# EAGLE board PIC32_JTAG (EAGLE 7.6.0)
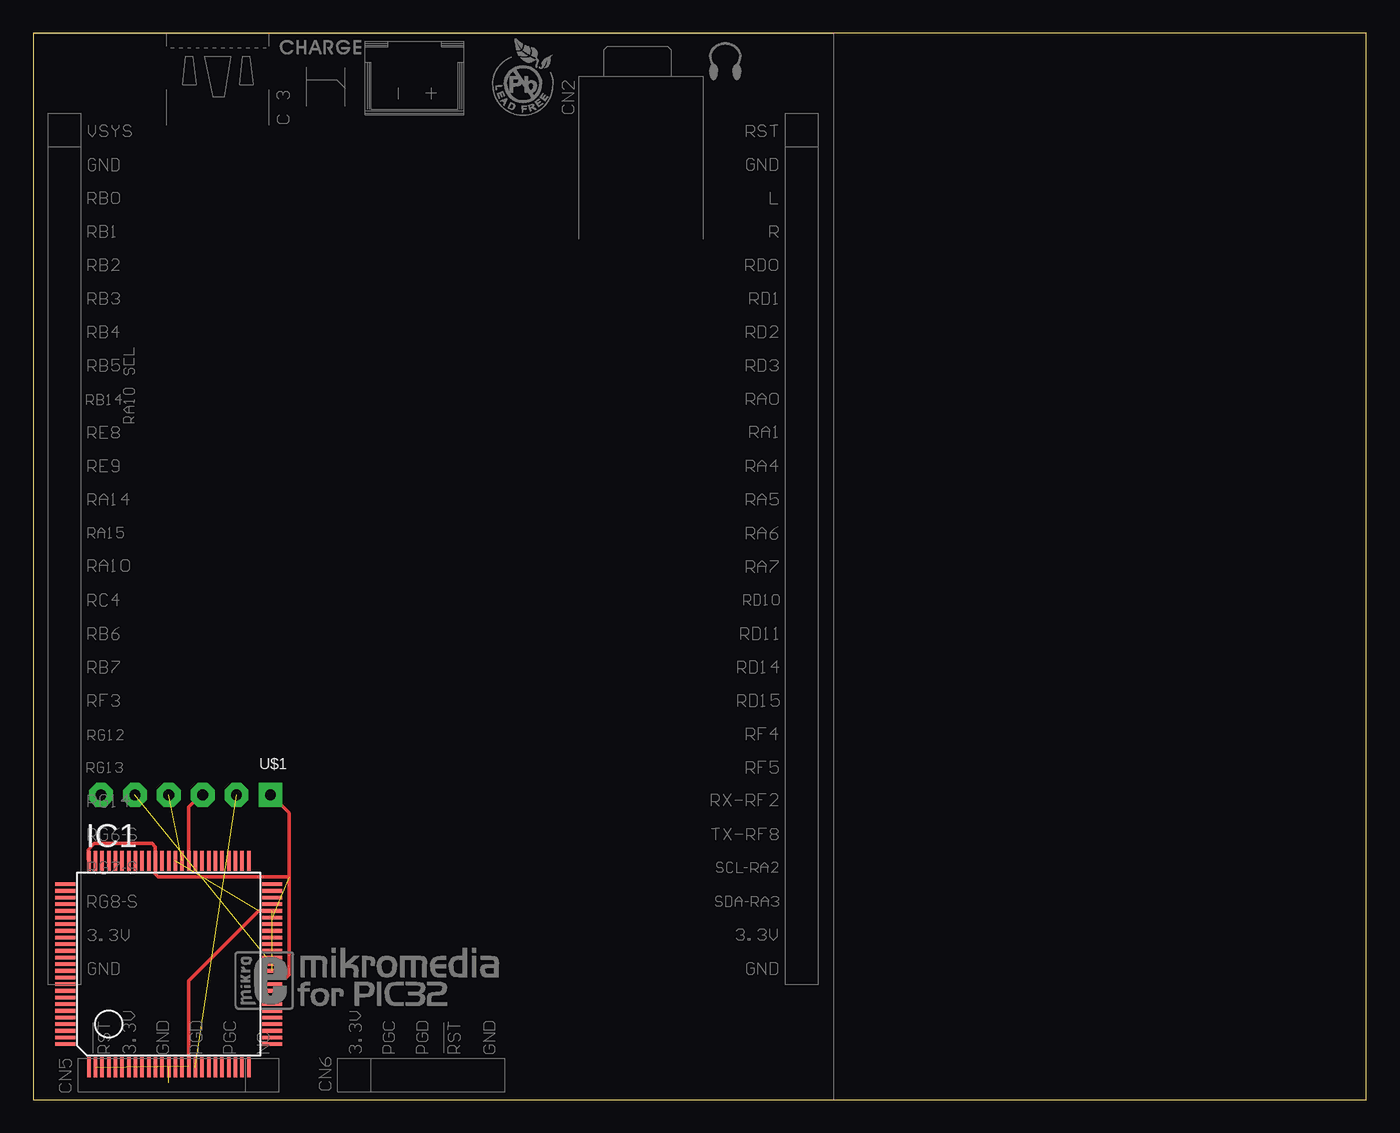
[diagram p0: board, top side]
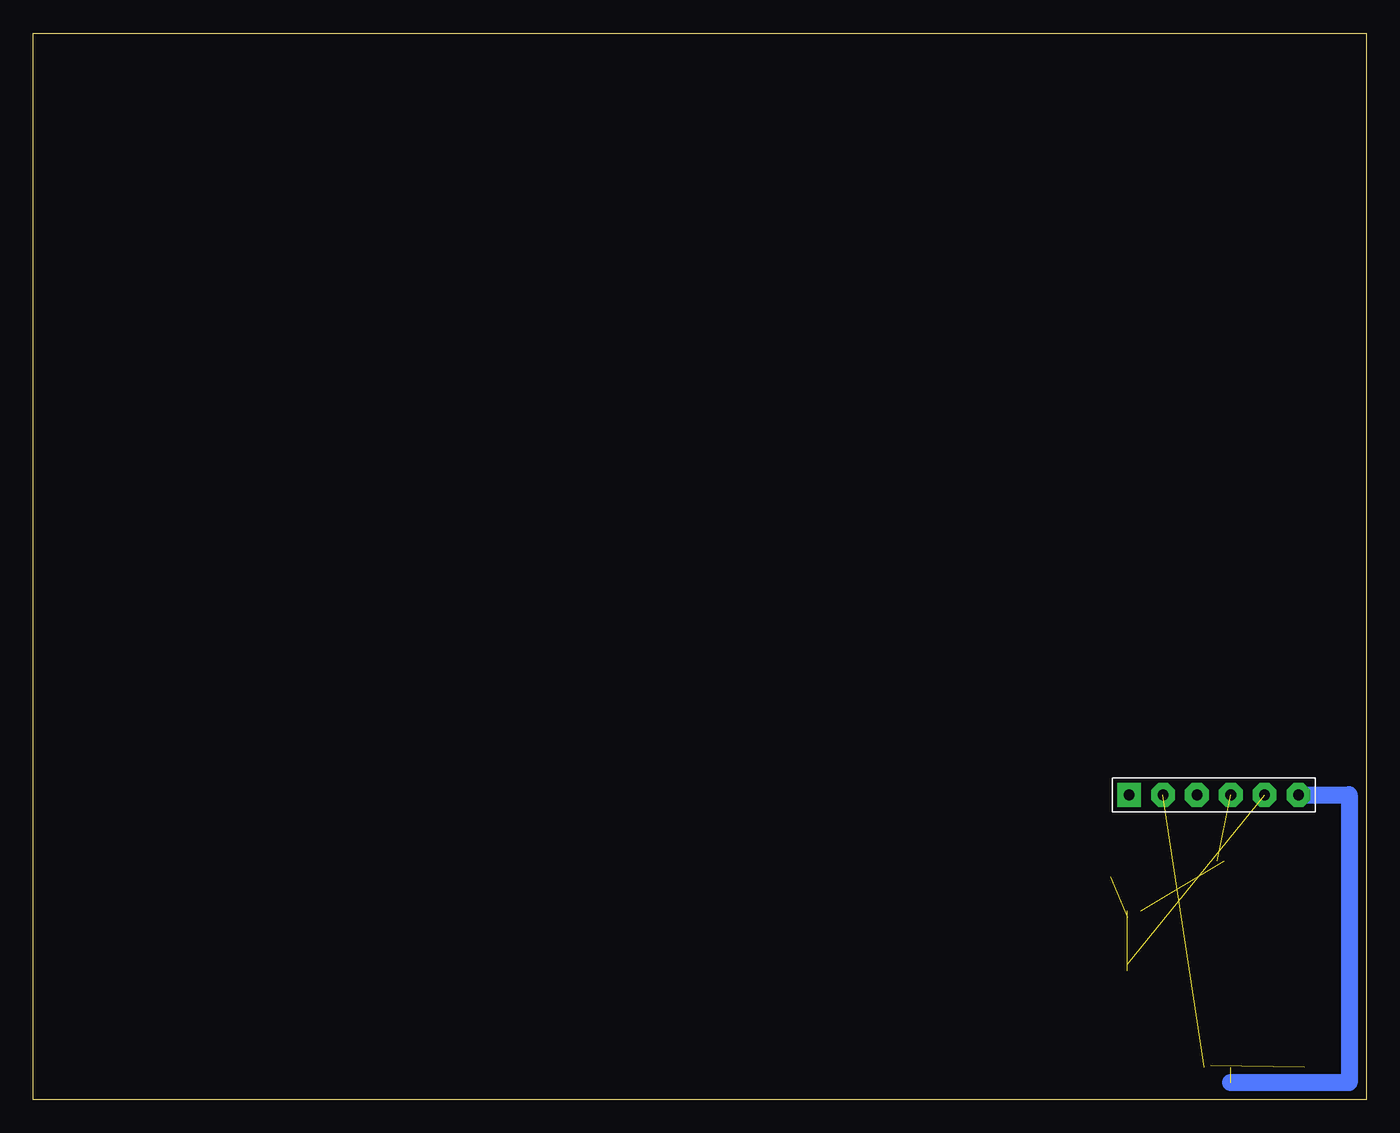
[diagram p1: board, bottom side, seen from below]

Size 100 x 80 mm. Coordinates in mm from the lower left corner, seen from the top.
Outline: 0,0 100,0 100,80 0,80 0,0
Copper layers (1*16): Top 0.035mm / dielectric 1.5mm / Bottom 0.035mm
Design rules "default": minimum track width 10mil, minimum drill 24mil, track to track 8mil, track to pad 8mil, pad to pad 8mil, via to via 8mil, smd to smd 8mil, copper to edge 40mil, drill to drill 8mil, minimum pad ring 10mil, minimum via ring 8mil, stop-mask expansion 4mil, vias tented up to drill 0mil, thermal gap 10mil
Net classes: 0 default: width 0.254 mm

## Footprints (pad centres in the part's own frame; a part is rotated, then mirrored left to right if it is on the bottom)
TQFP100 = smd 0.27 x 1.5: 1 -6,-7.75; 2 -5.5,-7.75; 3 -5,-7.75; 4 -4.5,-7.75; 5 -4,-7.75; 6 -3.5,-7.75; 7 -3,-7.75; 8 -2.5,-7.75; 9 -2,-7.75; 10 -1.5,-7.75; 11 -1,-7.75; 12 -0.5,-7.75; 13 0,-7.75; 14 0.5,-7.75; 15 1,-7.75; 16 1.5,-7.75; 17 2,-7.75; 18 2.5,-7.75; 19 3,-7.75; 20 3.5,-7.75; 21 4,-7.75; 22 4.5,-7.75; 23 5,-7.75; 24 5.5,-7.75; 25 6,-7.75; 51 6,7.75; 52 5.5,7.75; 53 5,7.75; 54 4.5,7.75; 55 4,7.75; 56 3.5,7.75; 57 3,7.75; 58 2.5,7.75; 59 2,7.75; 60 1.5,7.75; 61 1,7.75; 62 0.5,7.75; 63 0,7.75; 64 -0.5,7.75; 65 -1,7.75; 66 -1.5,7.75; 67 -2,7.75; 68 -2.5,7.75; 69 -3,7.75; 70 -3.5,7.75; 71 -4,7.75; 72 -4.5,7.75; 73 -5,7.75; 74 -5.5,7.75; 75 -6,7.75 | smd 1.5 x 0.27: 26 7.75,-6; 27 7.75,-5.5; 28 7.75,-5; 29 7.75,-4.5; 30 7.75,-4; 31 7.75,-3.5; 32 7.75,-3; 33 7.75,-2.5; 34 7.75,-2; 35 7.75,-1.5; 36 7.75,-1; 37 7.75,-0.5; 38 7.75,0; 39 7.75,0.5; 40 7.75,1; 41 7.75,1.5; 42 7.75,2; 43 7.75,2.5; 44 7.75,3; 45 7.75,3.5; 46 7.75,4; 47 7.75,4.5; 48 7.75,5; 49 7.75,5.5; 50 7.75,6; 76 -7.75,6; 77 -7.75,5.5; 78 -7.75,5; 79 -7.75,4.5; 80 -7.75,4; 81 -7.75,3.5; 82 -7.75,3; 83 -7.75,2.5; 84 -7.75,2; 85 -7.75,1.5; 86 -7.75,1; 87 -7.75,0.5; 88 -7.75,0; 89 -7.75,-0.5; 90 -7.75,-1; 91 -7.75,-1.5; 92 -7.75,-2; 93 -7.75,-2.5; 94 -7.75,-3; 95 -7.75,-3.5; 96 -7.75,-4; 97 -7.75,-4.5; 98 -7.75,-5; 99 -7.75,-5.5; 100 -7.75,-6
PIC32-JTAG = drill 0.8 pad 1.778 square: 1 -6.35,0 | drill 0.8 pad 1.778 octagon: 2 -3.81,0; 3 -1.27,0; 4 1.27,0; 5 3.81,0; 6 6.35,0

## Placement (x,y rotation side)
IC1  PIC32MX460F512L  [TQFP100]  10.16,10.16 0 top
U$1  PIC32-JTAG  [PIC32-JTAG]  11.43,22.86 180 top

## Library data of the parts
IC1 = mcu
U$1 = pinconn

## Nets
/MCLR: IC1.13 U$1.6
AVDD: IC1.30
AVSS: IC1.31
GND: IC1.36 IC1.45 IC1.65 IC1.75 U$1.1
TCK/RA1: IC1.38 U$1.5
TDI/RA4: IC1.60 U$1.3
TDO/RA5: IC1.61 U$1.4
TMS/RA0: IC1.17 U$1.2
VDD: IC1.2 IC1.16 IC1.37 IC1.46 IC1.62
VDDCORE: IC1.85
VSS: IC1.15

## Tracks (layer width: path | path; a pad name or v marks a point on that pad's centre or on a via)
/MCLR  (1 unrouted)
  Bottom 1.27: U$1.6 1.27,22.86 1.27,1.27 10.16,1.27
GND  (1 unrouted)
  Top 0.254: IC1.75 4.12,18.06 4.12,18.74 4.57,19.2 8.91,19.2 9.14,18.97 9.14,18.06 IC1.65 9.14,17.83 9.14,16.92 9.37,16.69 19.2,16.69 | 19.2,16.69 19.2,21.49 17.83,22.86 U$1.1 | 19.2,16.69 19.2,9.37 18.97,9.14 18.06,9.14 IC1.36
TCK/RA1  (1 unrouted)
TDI/RA4
  Top 0.254: IC1.60 11.66,18.06 11.66,21.95 12.57,22.86 U$1.3
TDO/RA5  (1 unrouted)
TMS/RA0  (1 unrouted)
VDD  (3 unrouted)
  Top 0.254: IC1.16 11.66,2.51 11.66,8.91 16.92,14.17 17.83,14.17 IC1.46